# EAGLE board 484 1.0 (EAGLE 7.6.0)
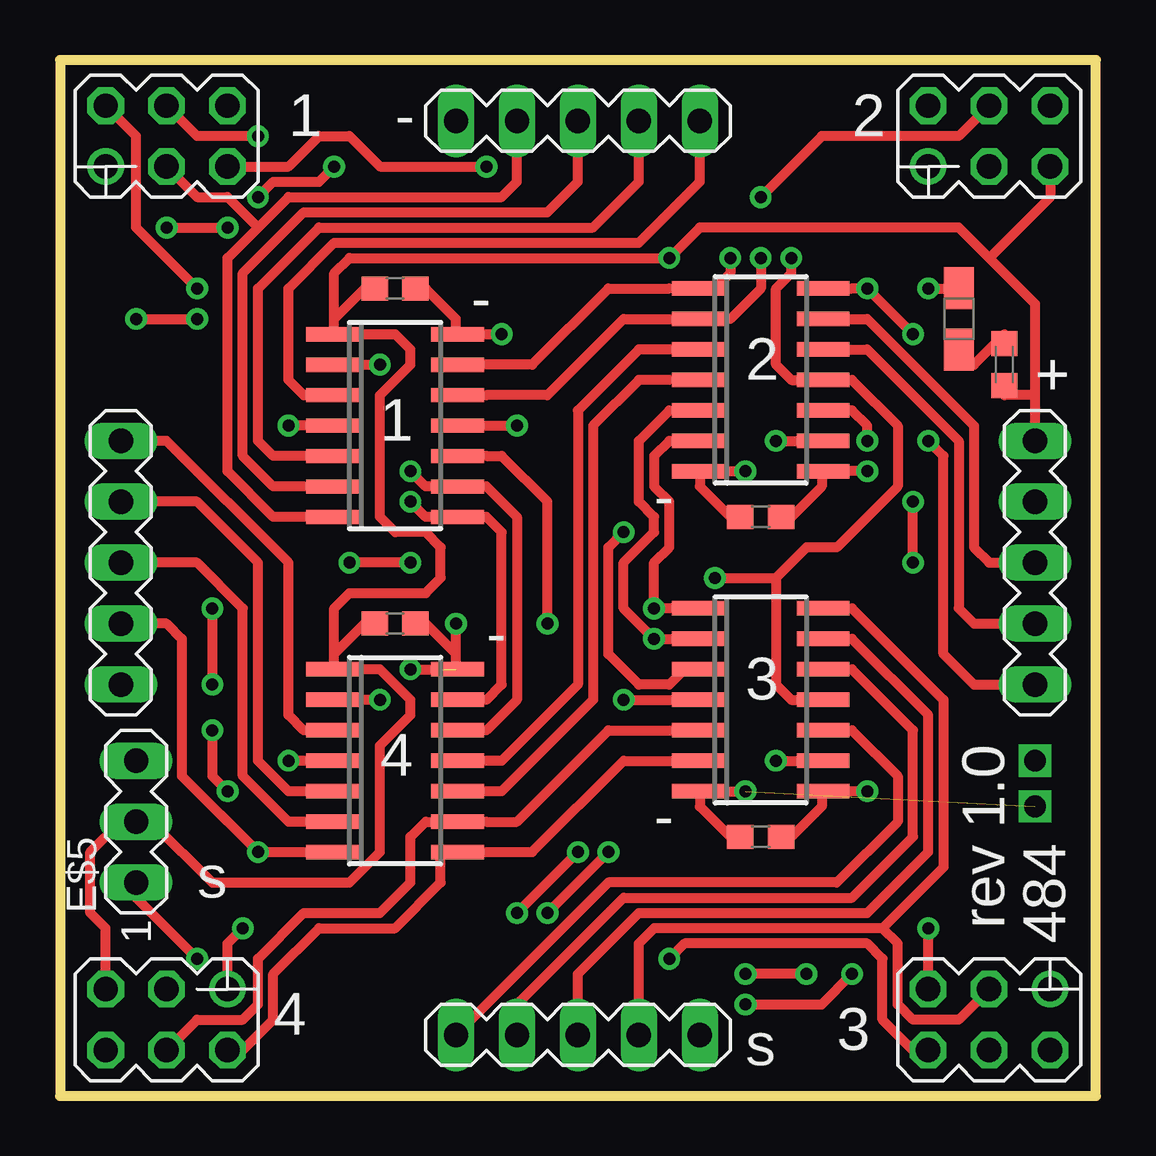
[diagram p0: board, top side]
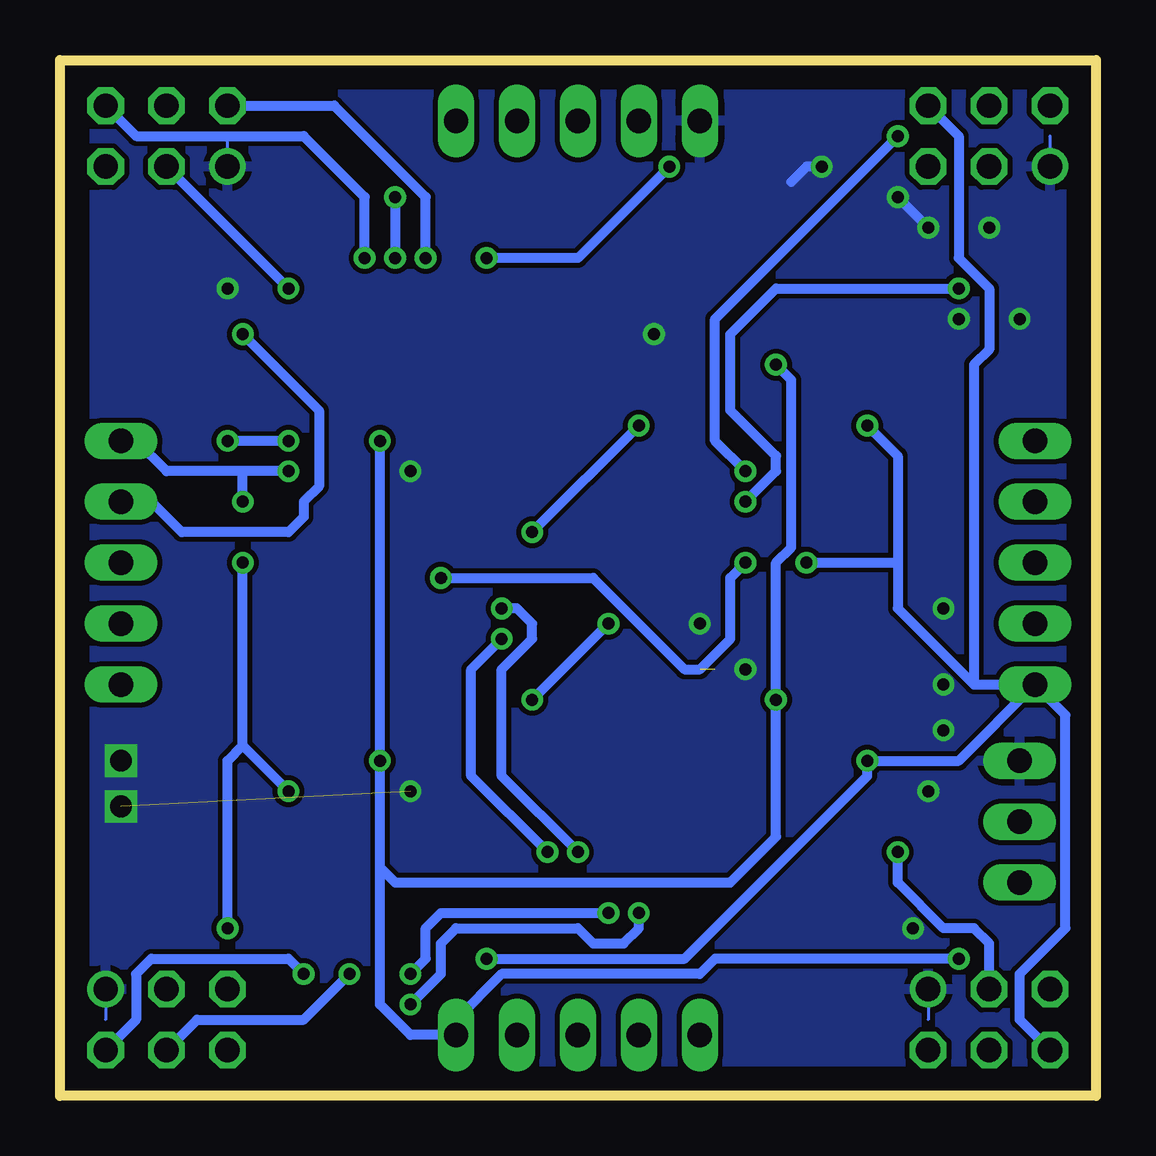
[diagram p1: board, bottom side, seen from below]

Size 43.18 x 43.18 mm. Coordinates in mm from the lower left corner, seen from the top.
Outline: 0,0 43.18,0 43.18,43.18 0,43.18 0,0
Copper layers (1*16): Top 0.035mm / dielectric 1.5mm / Bottom 0.035mm
Design rules "default": minimum track width 10mil, minimum drill 24mil, track to track 8mil, track to pad 8mil, pad to pad 8mil, via to via 8mil, smd to smd 8mil, copper to edge 40mil, drill to drill 8mil, minimum pad ring 10mil, minimum via ring 8mil, stop-mask expansion 4mil, vias tented up to drill 0mil, thermal gap 10mil

## Footprints (pad centres in the part's own frame; a part is rotated, then mirrored left to right if it is on the bottom)
SO14 = smd 0.6 x 2.2: 1 -3.81,-2.6; 2 -2.54,-2.6; 3 -1.27,-2.6; 4 0,-2.6; 5 1.27,-2.6; 6 2.54,-2.6; 7 3.81,-2.6; 8 3.81,2.6; 9 2.54,2.6; 10 1.27,2.6; 11 0,2.6; 12 -1.27,2.6; 13 -2.54,2.6; 14 -3.81,2.6
MA03-1 = drill 1.016 long: 1 -2.54,0; 2 0,0; 3 2.54,0
MA05-1 = drill 1.016 long: 2 -2.54,0; 3 0,0; 4 2.54,0; 5 5.08,0; GND -5.08,0
C1608 = smd 1.1 x 1: 1 -0.85,0; 2 0.85,0
MA03-2 = drill 1.016 octagon: 2 -2.54,1.27; 3 0,-1.27; 4 0,1.27; 5 2.54,-1.27; 6 2.54,1.27 | drill 1.016: GND -2.54,-1.27
C0603K = smd 1.05 x 1.08: 1 -0.875,0; 2 0.875,0
R/2012-12W = smd 1.75 x 1.26: + 1.275,0; - -1.275,0

## Placement (x,y rotation side)
E$1  [SO14]  13.97,27.94 270 top
E$2  [SO14]  29.21,29.85 270 top
E$3  [SO14]  13.97,13.97 270 top
E$4  [SO14]  29.21,16.51 270 top
E$5  [MA03-1]  3.18,11.43 90 top
E$6  [MA05-1]  21.59,2.54 0 top
E$8  [MA05-1]  21.59,40.64 180 top
E$9  [MA05-1]  40.64,22.22 270 top
E$10  [C1608]  13.97,19.68 0 top
E$11  [C1608]  13.97,33.66 0 top
E$12  [C1608]  29.21,24.13 0 top
E$13  [C1608]  29.21,10.79 0 top
E$14  [MA03-2]  4.44,3.18 180 top
E$15  [MA03-2]  38.73,3.18 180 top
E$16  [MA03-2]  38.73,40.01 0 top
E$17  [MA03-2]  4.44,40.01 0 top
E$18  [C0603K]  39.37,30.48 90 top
E$19  [R/2012-12W]  37.46,32.39 90 top
E$20  [MA05-1]  2.54,22.22 90 top

## Library data of the parts
E$1-E$4 = analog-devices
E$5 E$6 E$8 E$9 E$14-E$17 E$20 = con-lstb
E$10-E$13 = eagle-ltspice
E$18 E$19 = resistor

## Nets
GND: E$5.3 E$8.5 E$14.GND E$15.GND E$16.GND E$17.GND
S$2: E$14.6 E$15.6 E$17.6 E$20.GND
S$3: E$9.4
S$8: E$5.2 E$14.5
S$15: E$14.3 E$20.2
S$16: E$17.2
S$20: E$9.3
S$21: E$9.GND E$15.5 E$16.5 E$17.5
S$23: E$6.GND
S$25: E$17.4
S$27: E$6.2
S$28: E$6.3
S$29: E$14.4
S$30: E$8.GND
S$31: E$8.2
S$32: E$8.3
S$33: E$15.4
S$34: E$9.5
S$35: E$20.5
S$36: E$15.2
S$37: E$20.4
S$38: E$20.3
S$39: E$14.2
S$40: E$9.2 E$16.3
S$41: E$6.4 E$15.3
S$44: E$8.4 E$17.3
S$45: E$16.2
S$47: E$16.4
S$48: E$16.6
S$50: E$5.1 E$6.5

## Tracks (layer width: path | path; a pad name or v marks a point on that pad's centre or on a via)
GND  (via drill 0.5, 0.9)  (2 unrouted)
  Top 0.406: v4.44,36.2 v6.99,36.2 | v8.25,37.47 8.89,38.1 10.79,38.1 v11.43,38.73 | 16.51,17.78 16.51,18.42 | 16.51,18.42 15.24,19.68 | 16.51,18.42 v16.51,19.68 | v36.19,33.66 37.46,33.66 | 27.3,26.04 v28.57,26.04 | 27.3,12.7 v28.57,12.7 | v3.18,32.39 v5.71,32.39 | v6.35,20.32 v6.35,17.14 | v14.61,17.78 15.87,17.78 | v6.35,15.24 6.35,13.34 v6.99,12.7 | E$14.GND 6.99,6.35 v7.62,6.98 | 17.14,31.75 v18.42,31.75
  Bottom 0.406: v6.99,36.2 v8.25,37.47 | v11.43,38.73 12.07,38.73 12.7,38.1
  other vias: 40.64,13.97 40.64,12.07
  pour Bottom: 0,0 43.18,0 43.18,43.18 0,43.18
S$1  (via drill 0.5)
  Top 0.406: v23.5,16.51 26.04,16.51 | 17.78,26.67 18.42,26.67 20.32,24.77 v20.32,19.68
  Bottom 0.406: v20.32,19.68 v23.5,16.51
S$2  (via drill 0.5)
  Top 0.406: E$15.6 35.56,1.91 34.29,3.18 34.29,5.71 33.66,6.35 26.04,6.35 v25.4,5.71 | 32.39,29.85 33.02,29.85 34.92,27.94 34.92,25.4 32.39,22.86 31.11,22.86 29.85,21.59 | 29.85,21.59 29.85,17.14 30.48,16.51 31.11,16.51 | v27.3,21.59 29.85,21.59 | 10.79,27.94 v9.53,27.94 | v14.61,22.22 v12.07,22.22 | 10.79,13.97 v9.53,13.97
  Bottom 0.406: E$14.6 3.18,3.18 3.18,5.08 1.27,6.98 1.27,15.88 E$20.GND | v25.4,5.71 17.14,5.71 9.53,13.34 v9.53,13.97 5.71,13.97 E$20.GND | E$17.6 5.71,40.01 5.71,34.92 4.44,33.66 4.44,31.11 5.08,30.48 5.08,17.14 | v27.3,21.59 20.96,21.59 17.14,17.78 16.51,17.78 15.24,19.05 15.24,21.59 v14.61,22.22 | v9.53,27.94 8.25,26.67 8.25,22.22 | v12.07,22.22 8.25,22.22 | 8.25,22.22 8.25,20.32 5.08,17.14 | 5.08,17.14 E$20.GND
S$3
  Top 0.406: 32.39,31.11 33.66,31.11 37.46,27.31 37.46,20.32 38.1,19.68 E$9.4
S$4  (via drill 0.5)
  Top 0.406: 26.04,17.78 25.4,17.14 24.13,17.14 22.86,18.42 22.86,22.86 v23.5,23.5 | 17.78,27.94 v19.05,27.94
  Bottom 0.406: v19.05,27.94 v23.5,23.5
S$5
  Top 0.406: 26.67,26.04 26.67,25.4 27.94,24.13
S$6
  Top 0.406: 31.75,26.04 31.75,25.4 30.48,24.13
S$7
  Top 0.406: 31.75,12.7 31.75,12.07 30.48,10.79
S$8
  Top 0.406: E$14.5 1.9,6.98 1.27,7.62 1.27,10.16 2.54,11.43 E$5.2 3.81,11.43 6.35,8.89 12.07,8.89 13.33,10.16 13.33,14.61 14.61,15.88 14.61,16.51 13.33,17.78 12.07,17.78
S$9
  Top 0.406: 25.4,33.66 22.86,33.66 19.68,30.48 17.14,30.48
S$10
  Top 0.406: 26.04,32.39 23.5,32.39 20.32,29.21 17.78,29.21
S$11
  Top 0.406: 17.78,10.16 19.68,10.16 23.5,13.97 26.04,13.97
S$12
  Top 0.406: 17.78,11.43 19.05,11.43 22.86,15.24 26.04,15.24
S$13
  Top 0.406: 25.4,29.85 24.13,29.85 22.22,27.94 22.22,16.51 18.42,12.7 17.78,12.7
S$14
  Top 0.406: 26.04,31.11 24.13,31.11 21.59,28.57 21.59,17.14 18.42,13.97 17.78,13.97
S$15  (via drill 0.5)
  Top 0.406: E$20.2 4.44,19.68 5.08,19.05 5.08,13.34 v8.25,10.16 | v8.25,10.16 10.79,10.16 | 5.71,12.7 v8.25,10.16
  Bottom 0.406: E$14.3 4.44,6.35 5.08,6.98 6.35,6.98 8.25,8.89 v8.25,10.16
S$16  (via drill 0.5)
  Top 0.406: 15.87,24.13 15.24,24.13 v14.61,24.77 | v5.71,33.66 3.18,36.2 3.18,40.01 E$17.2
  Bottom 0.406: v14.61,24.77 13.33,26.04 13.33,26.67 15.24,28.57 15.24,31.75 13.33,33.66 v5.71,33.66
S$17
  Top 0.406: 16.51,31.75 16.51,32.39 15.24,33.66
S$18
  Top 0.406: 17.78,16.51 18.42,17.14 18.42,23.5 17.78,24.13
S$19
  Top 0.406: 17.78,25.4 19.05,24.13 19.05,16.51 17.78,15.24
S$20
  Top 0.406: 32.39,32.39 33.66,32.39 38.1,27.94 38.1,22.86 38.73,22.22 E$9.3
S$21  (via drill 0.5)
  Top 0.406: E$15.5 v36.19,6.98 | E$16.5 41.27,37.47 38.73,34.92 | 38.73,34.92 40.64,33.02 40.64,29.21 | 40.64,29.21 39.37,29.21 | 40.64,29.21 E$9.GND | v33.66,26.04 32.39,26.04 | v35.56,22.22 v35.56,24.77 | v33.66,12.7 32.39,12.7 | 38.73,34.92 37.46,36.2 26.67,36.2 v25.4,34.92 12.07,34.92 11.43,34.29 11.43,32.39 | E$17.5 9.53,38.73 10.79,40.01 12.07,40.01 13.33,38.73 v17.78,38.73 | 11.43,31.75 11.43,32.39 | 11.43,32.39 12.7,33.66
  Bottom 0.406: E$9.GND 40,27.31 38.73,26.04 35.56,26.04 | v33.66,26.04 35.56,26.04 | v35.56,24.77 35.56,26.04 | 35.56,14.61 v35.56,22.22 | 35.56,14.61 v33.66,12.7 | v17.78,38.73 21.59,34.92 v25.4,34.92 | v36.19,6.98 36.19,13.97 35.56,14.61
S$22
  Top 0.406: 39.37,31.75 38.1,30.48 37.46,30.48
S$23
  Top 0.406: E$6.GND 22.86,8.89 32.39,8.89 34.92,11.43 34.92,13.34 33.02,15.24 32.39,15.24
S$24
  Top 0.406: 26.67,12.7 26.67,12.07 27.94,10.79
S$25  (via drill 0.5)
  Top 0.406: 15.87,25.4 15.24,25.4 v14.61,26.04 | v8.25,40.01 5.71,40.01 E$17.4
  Bottom 0.406: v14.61,26.04 15.87,27.31 15.87,32.39 v8.25,40.01
S$26
  Top 0.406: 11.43,17.78 11.43,18.42 | 11.43,18.42 12.7,19.68 | 11.43,18.42 11.43,20.32 12.07,20.96 15.24,20.96 15.87,21.59 15.87,22.86 15.24,23.5 13.97,23.5 13.33,24.13 13.33,29.21 14.61,30.48 14.61,31.11 13.97,31.75 12.07,31.75
S$27
  Top 0.406: E$6.2 19.05,3.81 23.5,8.25 33.02,8.25 35.56,10.79 35.56,15.24 33.02,17.78
S$28
  Top 0.406: E$6.3 21.59,5.08 24.13,7.62 33.66,7.62 36.19,10.16 36.19,15.88 33.02,19.05
S$29
  Top 0.406: E$14.4 5.71,3.18 7.62,3.18 8.25,3.81 8.25,5.71 10.16,7.62 13.33,7.62 14.61,8.89 14.61,10.79 15.24,11.43 15.87,11.43
S$30
  Top 0.406: 10.79,29.21 10.16,29.21 9.53,29.85 9.53,33.66 11.43,35.56 24.13,35.56 26.67,38.1 E$8.GND
S$31
  Top 0.406: 10.79,26.67 8.89,26.67 8.25,27.31 8.25,33.66 10.79,36.2 22.22,36.2 24.13,38.1 E$8.2
S$32
  Top 0.406: 10.16,25.4 8.89,25.4 7.62,26.67 7.62,34.29 10.16,36.83 20.32,36.83 21.59,38.1 E$8.3
S$33  (via drill 0.5)
  Top 0.406: v31.11,5.08 v28.57,5.08 | 26.04,19.05 v24.76,19.05 23.5,20.32 23.5,22.22 24.76,23.5 24.76,24.13 24.13,24.77 24.13,27.31 25.4,28.57 | v22.86,10.16 v20.32,7.62
  Bottom 0.406: E$15.4 37.46,3.18 33.02,3.18 v31.11,5.08 | v28.57,5.08 27.94,5.71 27.94,6.98 27.3,7.62 v20.32,7.62 | v22.86,10.16 26.04,13.34 26.04,17.78 v24.76,19.05
S$34  (via drill 0.5)
  Top 0.406: E$9.5 38.1,17.14 36.83,18.42 36.83,26.67 v36.19,27.31 | v33.66,27.31 33.66,27.94 33.02,28.57 32.39,28.57
  Bottom 0.406: v33.66,27.31 v36.19,27.31
S$35
  Top 0.406: 10.79,15.24 10.16,15.24 9.53,15.88 9.53,22.22 4.44,27.31 E$20.5
S$36  (via drill 0.5)
  Top 0.406: v19.05,7.62 v21.59,10.16 | 26.04,20.32 v24.76,20.32 24.76,22.22 25.4,22.86 25.4,24.77 24.76,25.4 24.76,26.67 25.4,27.31 26.04,27.31 | v28.57,3.81 31.75,3.81 v33.02,5.08
  Bottom 0.406: v28.57,3.81 27.3,5.08 27.3,6.35 26.67,6.98 21.59,6.98 20.96,6.35 19.68,6.35 19.05,6.98 v19.05,7.62 | v21.59,10.16 24.76,13.34 24.76,17.78 23.5,19.05 23.5,19.68 24.13,20.32 v24.76,20.32 | E$15.2 40,3.18 40,5.08 39.37,5.71 33.66,5.71 v33.02,5.08
S$37
  Top 0.406: 10.79,12.7 9.53,12.7 8.25,13.97 8.25,22.22 5.71,24.77 E$20.4
S$38
  Top 0.406: 10.79,11.43 9.53,11.43 7.62,13.34 7.62,20.32 5.71,22.22 E$20.3
S$39
  Top 0.406: E$14.2 7.62,1.91 8.89,3.18 8.89,5.08 10.79,6.98 13.97,6.98 15.87,8.89 15.87,10.16
S$40  (via drill 0.5)
  Top 0.406: 32.39,33.66 33.02,33.66 v33.66,33.66 v35.56,31.75
  Bottom 0.406: v35.56,31.75 32.39,28.57 32.39,25.4 33.02,24.77 33.02,24.13 33.66,23.5 38.1,23.5 39.37,24.77 E$9.2 | v33.66,33.66 E$16.3
S$41
  Top 0.406: E$15.3 37.46,3.18 35.56,3.18 34.92,3.81 34.92,6.35 34.29,6.98 | E$6.4 24.13,6.35 24.76,6.98 34.29,6.98 | 33.02,20.32 36.83,16.51 36.83,9.53 34.29,6.98
S$44
  Top 0.406: E$17.3 5.71,37.47 6.99,37.47 8.25,36.2 | 10.79,24.13 8.89,24.13 6.99,26.04 6.99,34.92 8.25,36.2 | 8.25,36.2 9.53,37.47 18.42,37.47 19.05,38.1 E$8.4
S$45  (via drill 0.5)
  Top 0.406: v27.94,34.92 27.94,34.29 27.3,33.66
  Bottom 0.406: v27.94,34.92 27.94,37.47 31.75,41.28 E$16.2
S$47  (via drill 0.5)
  Top 0.406: E$16.4 37.46,40.01 31.75,40.01 v29.21,37.47 | v29.21,34.92 29.21,33.66 27.94,32.39 27.3,32.39
  Bottom 0.406: v29.21,37.47 v29.21,34.92
S$48  (via drill 0.5)
  Top 0.406: 31.11,29.85 30.48,29.85 29.85,30.48 29.85,33.66 30.48,34.29 v30.48,34.92
  Bottom 0.406: v30.48,34.92 30.48,37.47 33.02,40.01 40,40.01 E$16.6
S$50  (via drill 0.5)
  Top 0.406: E$5.1 3.18,8.25 v5.71,5.71 | v29.85,13.97 31.11,13.97 | v29.85,27.31 31.11,27.31 | v13.33,16.51 12.07,16.51 | 12.07,30.48 v13.33,30.48
  Bottom 0.406: v5.71,5.71 15.87,5.71 16.51,5.08 24.76,5.08 26.67,3.18 E$6.5 28.57,2.54 29.85,3.81 29.85,9.53 | 29.85,9.53 v29.85,13.97 v29.85,27.31 | 29.85,9.53 29.21,8.89 15.24,8.89 13.33,10.79 v13.33,16.51 13.33,22.22 12.7,22.86 12.7,29.85 v13.33,30.48

## Text on the board
tPlace: 1 | - | 2 | - | 2 | + | 1 | - | - | 3 | 4 | - | s | rev 1.0 | 484 | 4 | 3 | s